# Altium PCB MSB-PCB-1R2.PcbDoc
Units mm, origin at the board's own origin, x right, y up, seen from the top; angles counter-clockwise.
Board outline 51 x 51 mm, 2 copper layers (Top Layer, Bottom Layer), stack 1.57 mm thick; 48 components, 55 nets, 221 pads, 21 vias.
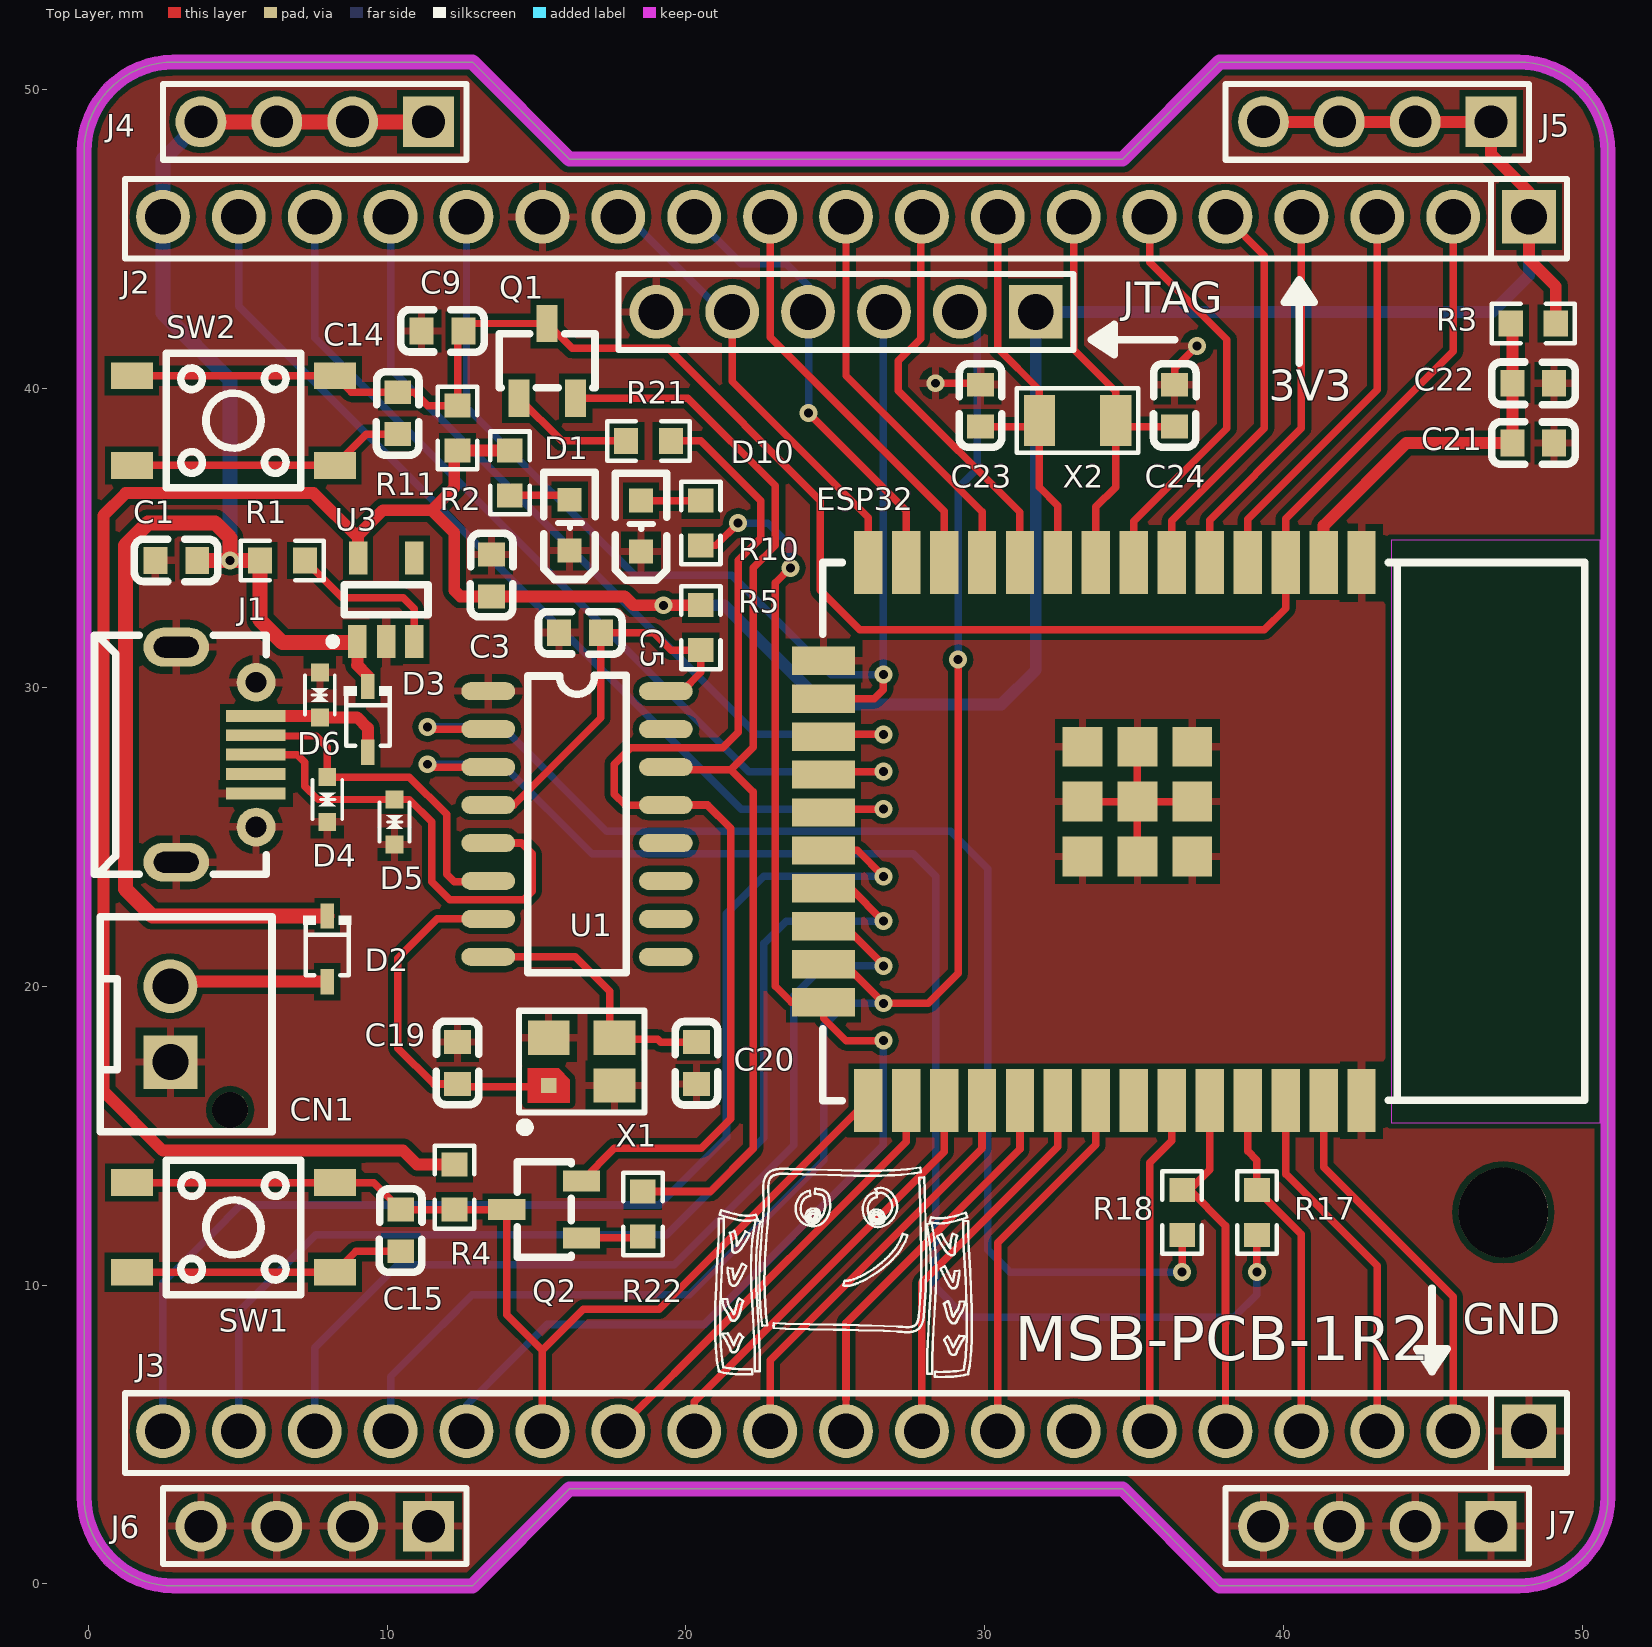
[diagram p0: Top Layer view]
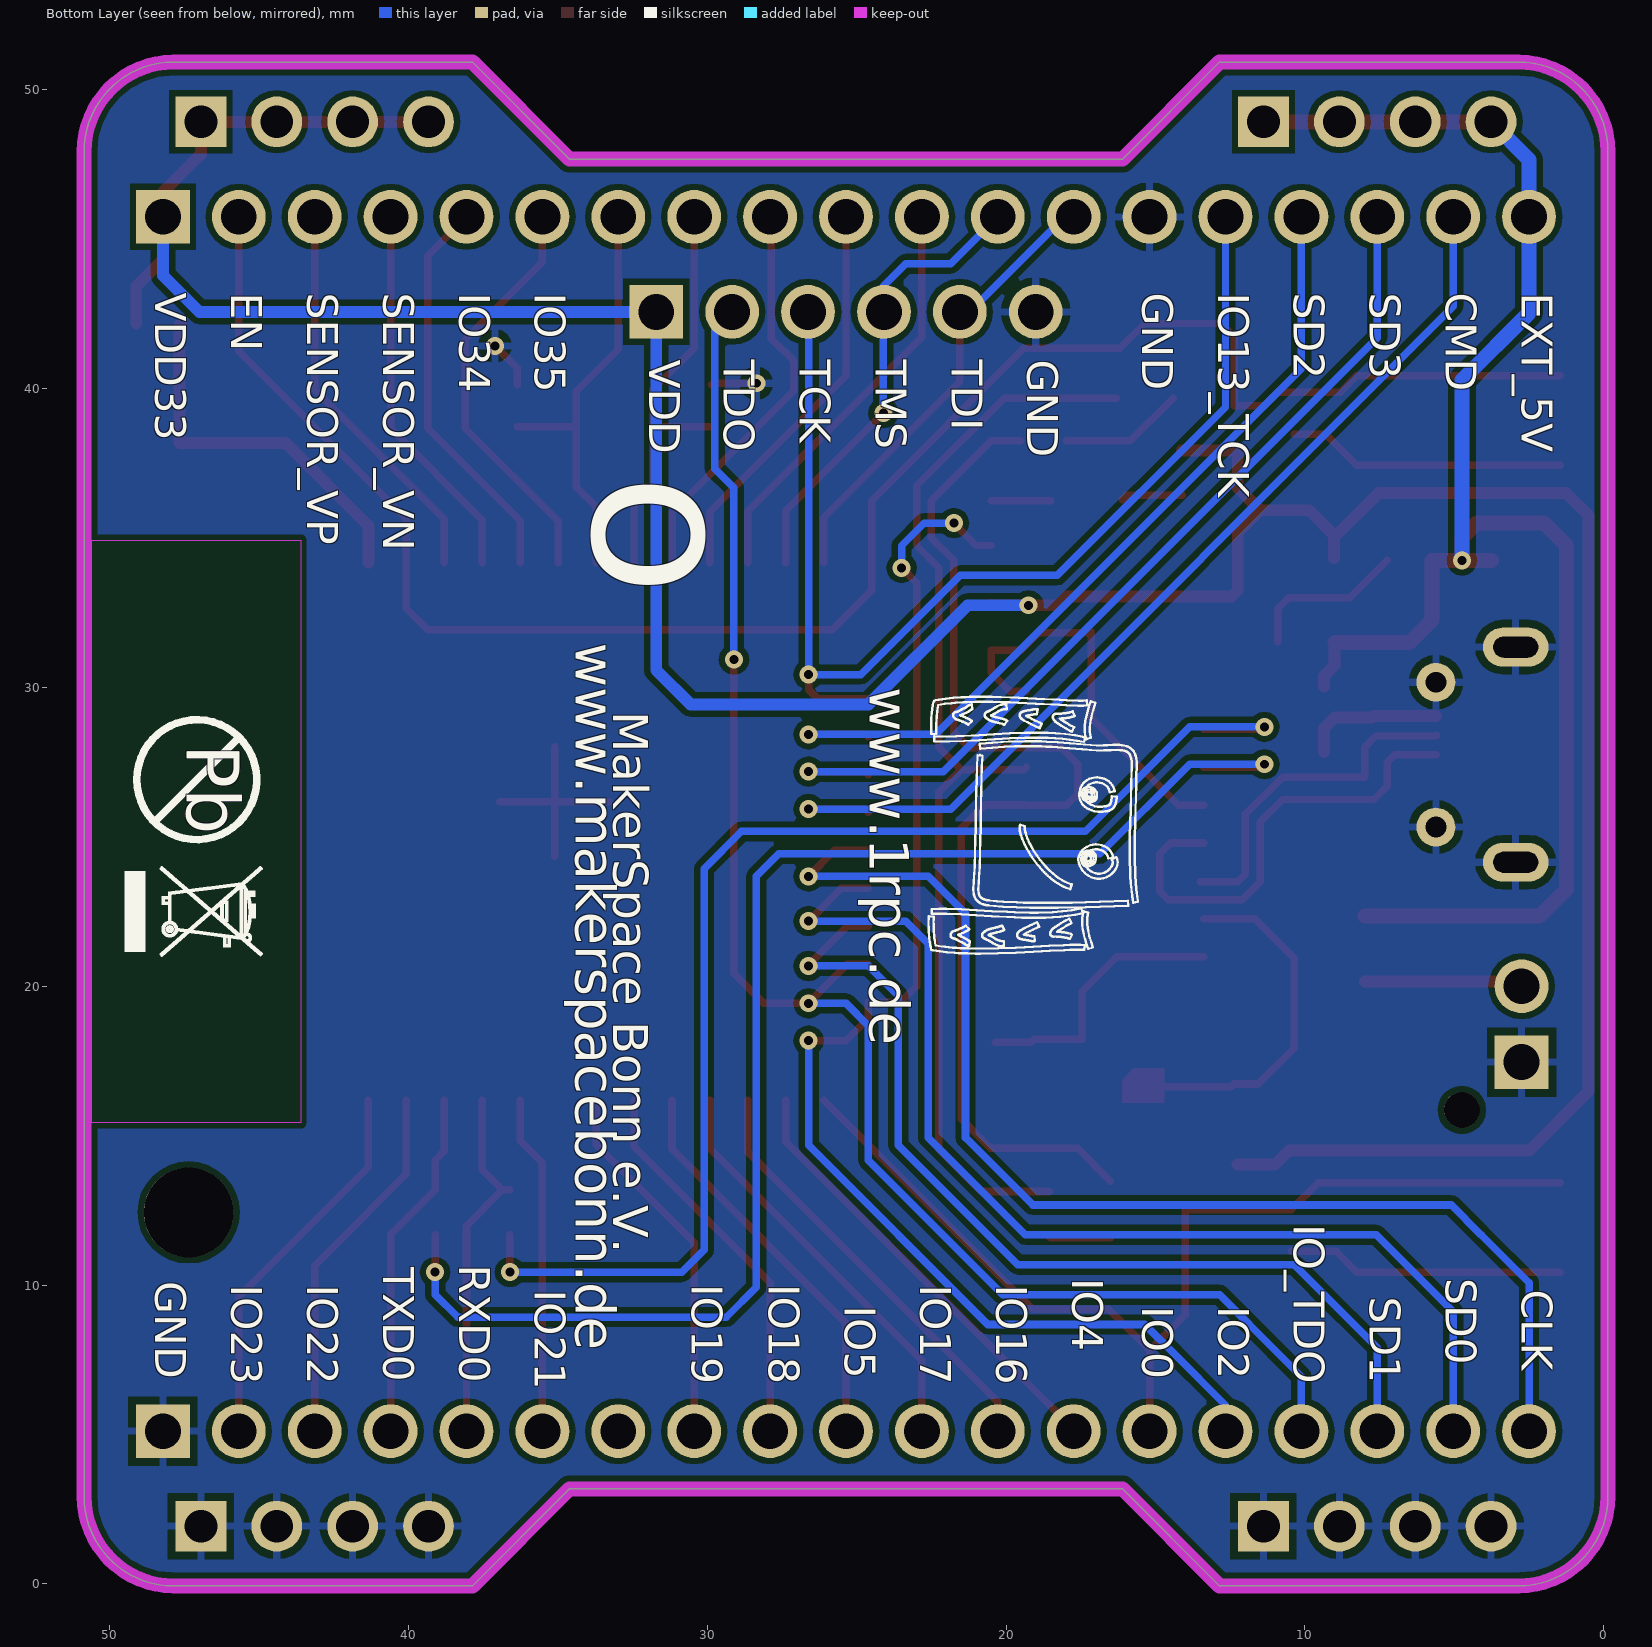
[diagram p1: Bottom Layer view, seen from below]

## Layer stack, top to bottom
Top Solder: solder mask 0.01, Solder Resist, Dk 3.5
Top Layer: signal copper 0.035
Dielectric 1: dielectric 1.5, FR-4, Dk 4.8
Bottom Layer: signal copper 0.035
Bottom Solder: solder mask 0.01, Solder Resist, Dk 3.5

## Board outline
-0.14,2.93 ccw(c2.86,2.93) 2.86,-0.07 12.86,-0.07 16.11,3.18 34.61,3.18 37.86,-0.07 47.86,-0.07 ccw(c47.86,2.93) 50.86,2.93 50.86,47.93 ccw(c47.86,47.93) 47.86,50.93 37.86,50.93 34.61,47.68 16.11,47.68 12.86,50.93 2.86,50.93 ccw(c2.86,47.93) -0.14,47.93

## Design rules (kind name [scope] priority, off if disabled: settings)
Clearance [All] p1: gap=0.2 ignorepadtopadclearanceinfootprint=FALSE
ComponentClearance [All] p1: gap=0.2 collisioncheckmode=3 verticalgap=0.2 showdistances=FALSE
HoleSize [All] p1: absolutevalues=TRUE maxlimit=3.5 minlimit=0.025 maxpercent=80.000 minpercent=20.000
MinimumSolderMaskSliver [All] p1: minsoldermaskwidth=0.05
PolygonConnect [All] p1: connectstyle=Relief reliefconductorwidth=0.254 reliefentries=4 polygonreliefangle="90 Angle" airgapwidth=0.254
RoomDefinition MSB-PCB-1R2 [InComponentClass('MSB-PCB-1R2')] p1: confinementstyle=ConfineIn formatcopy=TRUE lockcomponents=FALSE outline -0.14,-0.07 50.86,-0.07 50.86,50.93 -0.14,50.93
RoutingVias [All] p1: holewidth=0.3 width=0.6 viastyle="Through Hole" minholewidth=0.3 minwidth=0.6 maxholewidth=0.7 maxwidth=1
SilkToSilkClearance [All] p1 off: silktosilkclearance=0.1
SilkToSolderMaskClearance [IsPad] p1: minsilkscreentomaskgap=0.1 clearancetoexposedcopper=TRUE
SolderMaskExpansion [All] p1: expansion=0.102
Width [All] p1: maxlimit=0.6 minlimit=0.2 preferedwidth=0.25
25 further rules are at their usual default settings.

## Components (designator, comment, footprint, x,y, rotation, side; value= is the part's Value field where it differs from the comment)
C1 "22uF" C0603 2.95,34.25 r0 top
C3 "22uF" C0603 13.5,33.75 r270 top
C5 "100nF" C0603 16.46,31.83 r180 top
C9 "100nF" C0603 11.86,41.93 r0 top
C14 "100nF" C0603 10.36,39.18 r90 top
C15 "100nF" C0603 10.46,11.83 r90 top
C19 "20pF" C0603 12.36,17.43 r270 top
C20 "20pF" C0603 20.36,17.43 r90 top
C21 "22uF" C0603 48.36,38.18 r180 top
C22 "100nF" C0603 48.36,40.18 r180 top
C23 "12pF" C0603 29.86,39.43 r270 top
C24 "12pF" C0603 36.36,39.43 r270 top
CN1 "B2B-XH-AM (LF)(SN)" CONN-TH_B2B-XH-AM-LF-SN 2.75,18.73 r270 top
D1 "19-217/GHC-YR1S2/3T" LED0603-R-RD 16.11,35.43 r90 top
D2 "BAT760-7" SOD-323_L1.8-W1.3-LS2.5-RD 8,21.25 r270 top
D3 "BAT760-7" SOD-323_L1.8-W1.3-LS2.5-RD 9.36,28.93 r270 top
D4 "LESD5D5.0CT1G" SOD-523_L1.2-W0.8-LS1.6-BI 8,26.25 r90 top
D5 "LESD5D5.0CT1G" SOD-523_L1.2-W0.8-LS1.6-BI 10.25,25.5 r90 top
D6 "LESD5D5.0CT1G" SOD-523_L1.2-W0.8-LS1.6-BI 7.75,29.75 r270 top
D10 "19-217/BHC-ZL1M2RY/3T" LED0603-R-RD 18.5,35.399 r90 top
ESP32 "ESP32-WROOM-32E(4MB)" WIFI-SMD_ESP32-WROOM-32E 33.61,25.18 r180 top
J1 "MICROXNJ" MICRO-USB-SMD_MICROXNJ 4.283,27.75 r270 top
J2 "12251120CNG0S115005" HDR-TH_19P-P2.54-V 24.09,45.75 r180 top
J3 "12251120CNG0S115005" HDR-TH_19P-P2.54-V 24.09,5.11 r180 top
J4 "MTP125-1104S1" HDR-TH_4P-P2.54-V 7.58,48.93 r180 top
J5 "MTP125-1104S1" HDR-TH_4P-P2.54-V 43.14,48.93 r180 top
J6 "MTP125-1104S1" HDR-TH_4P-P2.54-V 7.58,1.93 r180 top
J7 "MTP125-1104S1" HDR-TH_4P-P2.54-V 43.14,1.93 r180 top
JTAG "MTP125-1106S1" HDR-TH_6P-P2.54-V 25.36,42.57 r180 top
Q1 "S8050_C2146" SOT-23-3_L3.0-W1.7-P0.95-LS2.9-BR 15.36,40.93 r270 top
Q2 "S8050_C2146" SOT-23-3_L3.0-W1.7-P0.95-LS2.9-BR 15.26,12.53 r0 top
R1 "1.8K" R0603 6.497,34.25 r0 top
R2 "560" R0603 14.11,37.18 r90 top
R3 "0" R0603 48.36,42.18 r180 top
R4 "10K" R0603 12.26,13.277 r90 top
R5 "0" R0603 20.5,32 r90 top
R10 "560" R0603 20.5,35.503 r270 top
R11 "10K" R0603 12.36,38.68 r270 top
R17 "270" R0603 39.11,12.43 r270 top
R18 "270" R0603 36.61,12.43 r270 top
R21 "10K" R0603 18.75,38.25 r180 top
R22 "10K" R0603 18.56,12.377 r270 top
SW1 "GT-TC074A-H038-L1" SW-SMD_4P-L4.5-W4.5-P3.00-LS7.0 4.86,11.93 r180 top
SW2 "GT-TC074A-H038-L1" SW-SMD_4P-L4.5-W4.5-P3.00-LS7.0 4.86,38.93 r180 top
U1 "CH340G" SOIC-16_L9.9-W3.9-P1.27-LS6.0-TL 16.36,25.43 r270 top
U3 "AP2112K-3.3TRG1" SOT-25-5_L3.0-W1.8-P0.95-LS3.0-BR 9.96,32.93 r270 top
X1 "12MHz" OSC-SMD_4P-L3.2-W2.5-BL 16.51,17.48 r0 top
X2 "32.768KHz" OSC-SMD_L3.2-W1.5 33.11,38.93 r0 top

## Footprints (in the part's own frame and the unit in brackets; to place one, negate y for a bottom-side part, rotate by r counter-clockwise, add the part's x,y. Pads: shape width x height; smd on the part's side, far side on the other; paste and mask are expansions set on the pad)
C0603 [mm]
  rect 0.8x0.9 smd: 1(-0.7,0) 2(0.7,0)
  silkscreen extent -1.41,-0.71 1.39,0.72
CONN-TH_B2B-XH-AM-LF-SN [mm]
  rect 1.8x1.8 hole 1.2: 1(1.27,0)
  round 1.8 hole 1.2: 2(-1.27,0)
  round 1.2 hole 1.2 unplated: ""(2.87,2)
  silkscreen extent -3.6,-2.35 3.6,3.4
HDR-TH_4P-P2.54-V [mm]
  rect 1.7x1.7 hole 1.1: 1(-3.81,0)
  round 1.7 hole 1.1: 2(-1.27,0) 3(1.27,0) 4(3.81,0)
  silkscreen extent -5.08,-1.27 5.08,1.27
HDR-TH_6P-P2.54-V [mm]
  rect 1.8x1.8 hole 1.2: 1(-6.35,0)
  round 1.8 hole 1.2: 2(-3.81,0) 3(-1.27,0) 4(1.27,0) 5(3.81,0) 6(6.35,0)
  silkscreen extent -7.62,-1.27 7.62,1.27
HDR-TH_19P-P2.54-V [mm]
  rect 1.8x1.8 hole 1.2: 1(-24.13,0)
  round 1.8 hole 1.2: 2(-21.59,0) 3(-19.05,0) 4(-16.51,0) 5(-13.97,0) 6(-11.43,0) 7(-8.89,0) 8(-6.35,0) 9(-3.81,0) 10(-1.27,0) 11(1.27,0) 12(3.81,0) 13(6.35,0) 14(8.89,0) 15(11.43,0) 16(13.97,0) 17(16.51,0) 18(19.05,0) 19(21.59,0)
  silkscreen extent -25.4,-1.27 22.86,1.4
LED0603-R-RD [mm]
  rect 0.8x0.8 smd: 1(0.851,0) 2(-0.851,0)
  silkscreen extent -1.82,-0.86 1.77,0.86
MICRO-USB-SMD_MICROXNJ [mm]
  rect 0.4x2 smd mask+0: 1(-1.3,1.327) 2(-0.65,1.327) 3(0,1.327) 4(0.65,1.327) 5(1.3,1.327)
  round 1.3 hole 0.7: 6(2.425,1.335) 9(-2.425,1.335)
  oval 1.3x2.2 hole 0.7 slot 1.5 at 90 deg: 7(3.6,-1.335) 8(-3.6,-1.335)
  silkscreen extent -4,-4.07 4,1.68
OSC-SMD_4P-L3.2-W2.5-BL [mm]
  rect 0.508x0.508 smd: 1(-1.1,-0.8)
  rect 1.4x1.15 smd: 2(1.1,-0.8) 3(1.1,0.8) 4(-1.1,0.8)
  Top Layer region: -1.8,-0.225 -0.762,-0.225 -0.4,-0.604 -0.4,-1.375 -1.8,-1.375
  silkscreen extent -2.1,-2.35 2.1,1.7
OSC-SMD_L3.2-W1.5 [mm]
  rect 1.05x1.7 smd: 1(-1.275,0) 2(1.275,0)
  silkscreen extent -2.03,-1.08 2.03,1.08
R0603 [mm]
  rect 0.806x0.864 smd: 1(-0.753,0) 2(0.753,0)
  silkscreen extent -1.39,-0.66 1.39,0.66
SOD-323_L1.8-W1.3-LS2.5-RD [mm]
  rect 0.845x0.455 smd: 1(-1.098,0) 2(1.098,0)
  silkscreen extent -1.1,-0.8 0.88,0.8
SOD-523_L1.2-W0.8-LS1.6-BI [mm]
  rect 0.6x0.6 smd: 1(-0.75,0) 2(0.75,0)
  silkscreen extent -0.65,-0.5 0.65,0.5
SOIC-16_L9.9-W3.9-P1.27-LS6.0-TL [mm]
  oval 0.6x1.8 smd: 1(-4.445,-2.972) 2(-3.175,-2.972) 3(-1.905,-2.972) 4(-0.635,-2.972) 5(0.635,-2.972) 6(1.905,-2.972) 7(3.175,-2.972) 8(4.445,-2.972) 9(4.445,2.972) 10(3.175,2.972) 11(1.905,2.972) 12(0.635,2.972) 13(-0.635,2.972) 14(-1.905,2.972) 15(-3.175,2.972) 16(-4.445,2.972)
  silkscreen extent -4.98,-1.65 4.98,1.65
SOT-23-3_L3.0-W1.7-P0.95-LS2.9-BR [mm]
  rect 1.25x0.7 smd: 1(1.25,-0.95) 2(1.25,0.95) 3(-1.25,0)
  silkscreen extent -0.9,-1.6 0.9,1.6
SOT-25-5_L3.0-W1.8-P0.95-LS3.0-BR [mil]
  rect 43.5x24.5 smd: 1(55,-37.5) 2(55,0.5) 3(55,37.5) 4(-55,37.5) 5(-55,-36.5)
  silkscreen extent -20,-75 60,56
SW-SMD_4P-L4.5-W4.5-P3.00-LS7.0 [mm]
  rect 1.4x0.9 smd: 1(-3.4,1.5) 2(3.4,1.5) 3(-3.4,-1.5) 4(3.4,-1.5)
  silkscreen extent -2.25,-2.25 2.25,2.25
WIFI-SMD_ESP32-WROOM-32E [mm]
  rect 0.95x2.1 smd: 1(-9.002,-9) 2(-7.732,-9) 3(-6.462,-9) 4(-5.192,-9) 5(-3.922,-9) 6(-2.652,-9) 7(-1.382,-9) 8(-0.112,-9) 9(1.158,-9) 10(2.428,-9) 11(3.698,-9) 12(4.968,-9) 13(6.238,-9) 14(7.508,-9) 25(7.507,9) 26(6.237,9) 27(4.967,9) 28(3.697,9) 29(2.427,9) 30(1.157,9) 31(-0.113,9) 32(-1.383,9) 33(-2.653,9) 34(-3.923,9) 35(-5.193,9) 36(-6.463,9) 37(-7.733,9) 38(-9.003,9)
  rect 2.1x0.95 smd: 15(9.002,-5.715) 16(9.002,-4.445) 17(9.002,-3.175) 18(9.002,-1.905) 19(9.002,-0.635) 20(9.002,0.635) 21(9.002,1.905) 22(9.002,3.175) 23(9.002,4.445) 24(9.002,5.715)
  rect 1.33x1.33 smd: 39(-3.337,-2.835) 39(-3.337,-1) 39(-3.337,0.835) 39(-1.502,0.835) 39(-1.502,-1) 39(-1.502,-2.835) 39(0.333,0.835) 39(0.333,-1) 39(0.333,-2.835)
  silkscreen extent -16.48,-9 9.02,9.02

## Part data
C1 C3 C21: BOM_JLCPCB Part Class="Extended Part", BOM_Manufacturer="Murata Electronics", BOM_Manufacturer Part=GRM188R61A226ME15L, BOM_Supplier=LCSC, BOM_Supplier Part=C167429, Contributor=LCSC, nameAlias=Capacitance, spicePre=C, spiceSymbolName=GRM188R61A226ME15L
C5 C9 C14 C15 C22: BOM_JLCPCB SMD=Yes, BOM_Manufacturer=YAGEO, BOM_Manufacturer Part=CC0603KRX7R9BB104, BOM_LCSC Assembly=Yes, BOM_Supplier=LCSC, BOM_Supplier Part=C14663, nameAlias=Capacitance, SMT Type=Basic, spicePre=C, spiceSymbolName=CC0603KRX7R9BB104
C19 C20: BOM_Manufacturer=CCTC, BOM_Manufacturer Part=TCC0603COG200J500CT, BOM_Supplier=LCSC, BOM_Supplier Part=C376774, Contributor=LCSC, nameAlias=Capacitance, spicePre=C, spiceSymbolName=TCC0603COG200J500CT
C23 C24: BOM_Manufacturer=CCTC, BOM_Manufacturer Part=TCC0603COG120J500CT, BOM_Supplier=LCSC, BOM_Supplier Part=C376767, Contributor=LCSC, nameAlias=Capacitance, spicePre=C, spiceSymbolName=TCC0603COG120J500CT
CN1: BOM_JLCPCB Part Class="Extended Part", BOM_Manufacturer="JST Sales America", BOM_Manufacturer Part=-, BOM_Supplier=LCSC, BOM_Supplier Part=C161869, Contributor=LCSC, spicePre=C, spiceSymbolName="B2B-XH-AM (LF)(SN)"
D1 D10: BOM_JLCPCB Part Class="Basic Part", BOM_Manufacturer=EVERLIGHT, BOM_Supplier=LCSC, spicePre=L
  D1: BOM_Manufacturer Part=19-217/GHC-YR1S2/3T, BOM_Supplier Part=C72043, spiceSymbolName=19-217/GHC-YR1S2/3T
  D10: BOM_Manufacturer Part=19-217/BHC-ZL1M2RY/3T, BOM_Supplier Part=C72041, spiceSymbolName=19-217/BHC-ZL1M2RY/3T
D2 D3: BOM_JLCPCB Part Class="Extended Part", BOM_Manufacturer=DIODES, BOM_Manufacturer Part=BAT760-7, BOM_Supplier=LCSC, BOM_Supplier Part=C124187, Contributor=LCSC, spicePre=D, spiceSymbolName=BAT760-7
D4 D5 D6: BOM_JLCPCB Part Class="Extended Part", BOM_Manufacturer="Leshan Radio", BOM_Manufacturer Part=LESD5D5.0CT1G, BOM_Supplier=LCSC, BOM_Supplier Part=C383211, Contributor=LCSC, spicePre=D, spiceSymbolName=LESD5D5.0CT1G
ESP32: BOM_LCSC Assembly=Yes, BOM_Manufacturer="Espressif Systems", BOM_Manufacturer Part=ESP32-WROOM-32E(4MB), BOM_Supplier=LCSC, BOM_Supplier Part=C701341, Contributor=LCSC, SMT Type=Extend, spicePre=U, spiceSymbolName=ESP32-WROOM-32E(4MB)
J1: BOM_Manufacturer="SHOU HAN", BOM_Manufacturer Part=MicroXNJ, BOM_Supplier=LCSC, BOM_Supplier Part=C404969, Contributor=LCSC, spicePre=U, spiceSymbolName=MICROXNJ
J2 J3: BOM_JLCPCB Part Class="Extended Part", BOM_Manufacturer=JILN, BOM_Manufacturer Part=12251120CNG0S115005, BOM_Supplier=LCSC, BOM_Supplier Part=C429964, Contributor=LCSC, spicePre=H, spiceSymbolName=12251120CNG0S115005
J4 J5 J6 J7 JTAG: BOM_JLCPCB Part Class="Extended Part", BOM_Manufacturer=MINTRON, BOM_Supplier=LCSC, Contributor=LCSC, spicePre=U
  J4 J5 J6 J7: BOM_Manufacturer Part=MTP125-1104S1, BOM_Supplier Part=C358686, spiceSymbolName=MTP125-1104S1
  JTAG: BOM_Manufacturer Part=MTP125-1106S1, BOM_Supplier Part=C358688, spiceSymbolName=MTP125-1106S1
Q1 Q2: BOM_JLCPCB SMD=Yes, BOM_Manufacturer=CJ, BOM_Manufacturer Part=S8050, BOM_LCSC Assembly=Yes, BOM_Supplier=LCSC, BOM_Supplier Part=C2146, image=//image.lceda.cn/szlcsc/C2146.jpg, SMT Type=Basic, spicePre=Q, spiceSymbolName=S8050_C2146
R1: BOM_JLCPCB Part Class="Extended Part", BOM_Manufacturer=UniOhm, BOM_Manufacturer Part=0603WAJ0182T5E, BOM_Supplier=LCSC, BOM_Supplier Part=C25991, nameAlias="Resistance (Ohms)", spicePre=R, spiceSymbolName=0603WAJ0182T5E
R2 R10: BOM_JLCPCB Part Class="Basic Part", BOM_Manufacturer=UniOhm, BOM_Manufacturer Part=0603WAF5600T5E, BOM_Supplier=LCSC, BOM_Supplier Part=C23204, nameAlias="Resistance (Ohms)", spicePre=R, spiceSymbolName=0603WAF5600T5E
R3 R5: BOM_JLCPCB SMD=Yes, BOM_Manufacturer=UniOhm, BOM_Manufacturer Part=0603WAF0000T5E, BOM_LCSC Assembly=Yes, BOM_Supplier=LCSC, BOM_Supplier Part=C21189, nameAlias="Resistance (Ohms)", SMT Type=Basic, spicePre=R, spiceSymbolName=0603WAF0000T5E
R4 R11 R21 R22: BOM_JLCPCB Part Class="Extended Part", BOM_Manufacturer=UniOhm, BOM_Manufacturer Part=0603WAJ0103T5E, BOM_Supplier=LCSC, BOM_Supplier Part=C15401, nameAlias="Resistance (Ohms)", spicePre=R, spiceSymbolName=0603WAJ0103T5E
R17 R18: BOM_JLCPCB Part Class="Extended Part", BOM_Manufacturer=UniOhm, BOM_Manufacturer Part=0603WAJ0271T5E, BOM_Supplier=LCSC, BOM_Supplier Part=C25223, nameAlias="Resistance (Ohms)", spicePre=R, spiceSymbolName=0603WAJ0271T5E
SW1 SW2: BOM_JLCPCB Part Class="Extended Part", BOM_Manufacturer=G-Switch, BOM_Manufacturer Part=GT-TC074A-H038-L1, BOM_Supplier=LCSC, BOM_Supplier Part=C843603, Contributor=LCSC, spicePre=S, spiceSymbolName=GT-TC074A-H038-L1
U1: BOM_JLCPCB SMD=Yes, BOM_Manufacturer=WCH, BOM_Manufacturer Part=CH340G, BOM_Supplier=LCSC, BOM_Supplier Part=C14267, image=//image.lceda.cn/szlcsc/C14267.jpg, SMT Type=Basic, spicePre=U, spiceSymbolName=CH340G, timeStamp=1468327462
U3: BOM_JLCPCB SMD=Yes, BOM_Manufacturer=DIODES, BOM_Manufacturer Part=AP2112K-3.3TRG1, BOM_Supplier=LCSC, BOM_Supplier Part=C51118, Contributor=LCSC, SMT Type=Extend, spicePre=U, spiceSymbolName=AP2112K-3.3TRG1
X1: BOM_JLCPCB SMD=Yes, BOM_Manufacturer=YXC, BOM_Manufacturer Part=X322512MSB4SI, BOM_LCSC Assembly=Yes, BOM_Supplier=LCSC, BOM_Supplier Part=C9002, nameAlias=Frequency, SMT Type=Basic, spicePre=X, spiceSymbolName=X322512MSB4SI
X2: BOM_JLCPCB Part Class="Extended Part", BOM_Manufacturer=TKD, BOM_Manufacturer Part=SF32K32768D31T-12.5, BOM_Supplier=LCSC, BOM_Supplier Part=C271654, Contributor=LCSC, nameAlias=Frequency, spicePre=X, spiceSymbolName=SF32K32768D31T-12.5

## Free pads (board coordinates)
  round 3 hole 3 unplated mask+1: 0(47.36,12.43)

## Via types
v1: diameter 0.6, hole 0.3, Top Layer to Bottom Layer, 21 vias

## Nets (pads, with @x,y where several pads share a name; then routed paths per layer and width w, separated by ;. In a path a pad name is that pad's centre, name@x,y a point inside that pad or via, vN(x,y) a via of type N, cw(c..) or ccw(c..) an arc to the next point about the centre after c; other vN are vias at no path point)
CLK: ESP32.20 J3.19 | length 41.5
  Top Layer w0.25: ESP32.20 25.745,24.545 v1(26.61,23.68)
  Bottom Layer w0.25: J3.19 2.5,10.07 4.11,11.68
  Bottom Layer w0.254: 4.11,11.68 5.11,12.68 19.11,12.68 21.36,14.93 21.36,22.43 22.61,23.68 v1(26.61,23.68)
CMD: ESP32.19 J2.18 | length 33.6
  Top Layer w0.25: ESP32.19 24.723,25.93 v1(26.61,25.93)
  Bottom Layer w0.25: J2.18 5.04,42.75 21.86,25.93 v1(26.61,25.93)
DTR: Q2.2 R21.1 U1.13 | length 37.4
  Top Layer w0.25: U1.13 17.975,26.065 17.61,26.43 17.61,27.43 18.16,27.98 21.23,27.98 21.75,28.5 21.75,34.25 22.5,35 22.5,36.25 20.5,38.25 R21.1
  Top Layer w0.254: Q2.2 17.61,14.58 20.51,14.58 21.5,15.57 21.5,25.29 20.725,26.065 U1.13
EN: C9.2 C14.2 ESP32.3 J2.2 Q1.3 R11.1 SW2.3 SW2.4 | length 63.2
  Top Layer w0.25: SW2.4 SW2.3 8.81,39.88 10.91,39.88 11.357,39.433 R11.1 12.36,41.73 C9.2 12.81,42.18 Q1.3 16.195,41.345 19.405,41.345 24.5,36.25 24.5,33.25 25.82,31.93 39.36,31.93 40.072,32.642 ESP32.3 40.072,35.642 45.68,41.25 J2.2
EXT_5V: C1.2 D2.1 D3.1 J2.19 J4.1 J4.2 J4.3 J4.4 R1.1 U3.1 | length 56.3
  Top Layer w0.4: 9,30.75 9.36,30.39 D3.1 ; 9.007,30.783 U3.1
  Top Layer w0.5: C1.2@3.75,34.25 v1(4.75,34.25) ; J4.4 J4.3 J4.2 J4.1 ; D2.1 2.152,22.348 1.25,23.25 1.25,34.75 2,35.5 4.25,35.5 4.75,35 v1(4.75,34.25) ; U3.1@9,31.5 6.5,31.5 5.744,32.256 R1.1 v1(4.75,34.25)
  Bottom Layer w0.5: J4.4 2.5,47.66 J2.19 2.5,42.53 4.75,40.28 v1(4.75,34.25)
GND: C1.1 C3.1 C5.2 C9.1 C19.1 C20.1 C21.1 C22.1 C23.1 C24.1 CN1.1 D1.2 D4.1 D5.1 D6.1 D10.2 ESP32.1 ESP32.15 ESP32.38 ESP32.39 J1.5 J1.6 J1.7 J1.8 J1.9 J2.14 J3.1 J6.1 J6.2 J6.3 J6.4 J7.1 J7.2 J7.3 J7.4 JTAG.6 U1.1 U3.2 X1.2 X1.4 | length 11.1
  Top Layer w0.25: J2.14 J2.14@15.2,46.39 ; v1(28.36,40.18) 29.81,40.18 C23.1 ; ESP32.39@33.277,26.18 ESP32.39@35.112,26.18 ; ESP32.39@35.112,24.345 ESP32.39@35.112,26.18 ; ESP32.39@35.112,28.015 ESP32.39@35.112,26.18 ; C24.1 36.36,40.68 v1(37.11,41.43) ; ESP32.39@36.947,26.18 ESP32.39@35.112,26.18
IO0: C15.2 ESP32.25 J3.14 Q2.3 R4.1 SW1.3 SW1.4 | length 35.2
  Top Layer w0.25: SW1.4 9.56,13.43 10.466,12.524 14.004,12.524 Q2.3 14.01,9.007 15.2,7.817 16.57,9.187 19.11,9.187 ESP32.25 ; J3.14 15.2,7.77
IO2: ESP32.24 J3.15 R10.2 | length 45.2
  Top Layer w0.25: R10.2 21,34.75 v1(21.75,35.5) ; v1(23.5,34) 23,33.5 23,20 23.535,19.465 ESP32.24 24.608,18.932 25.36,18.18 v1(26.61,18.18)
  Bottom Layer w0.25: J3.15 12.66,5.98 14.36,7.68 ; v1(21.75,35.5) 22.75,35.5 23.5,34.75 v1(23.5,34)
  Bottom Layer w0.254: 14.36,7.68 15.36,8.68 20.61,8.68 26.61,14.68 v1(26.61,18.18)
IO4: ESP32.26 J3.13 | length 15.1
  Top Layer w0.25: J3.13 17.74,5.17 19.61,7.04
  Top Layer w0.254: 19.61,7.04 27.373,14.803 ESP32.26
IO5: ESP32.29 J3.10 | length 13.5
  Top Layer w0.25: J3.10 25.36,6.18
  Top Layer w0.254: 25.36,6.18 25.36,8.73 31.183,14.553 ESP32.29
IO12_TDI: ESP32.14 J2.13 JTAG.5 | length 15.4
  Top Layer w0.25: JTAG.5 21.55,40.24 26.102,35.688 ESP32.14
  Bottom Layer w0.25: J2.13 18.04,45.75 21.22,42.57 JTAG.5
IO13_TCK: ESP32.16 J2.15 JTAG.3 | length 38.8
  Top Layer w0.25: ESP32.16 26.305,29.625 26.61,29.93 v1(26.61,30.43)
  Bottom Layer w0.25: J2.15 12.66,39.38 18.29,33.75 21.54,33.75 24.86,30.43 v1(26.61,30.43) 26.61,42.55 JTAG.3
IO14_TMS: ESP32.13 J2.12 JTAG.4 | length 15.5
  Top Layer w0.25: J2.12 J2.12@20.325,45.705 ; v1(24.11,39.18) 27.372,35.918 ESP32.13
  Bottom Layer w0.25: J2.12 21.85,44.18 23.36,44.18 24.09,43.45 JTAG.4 24.11,42.55 v1(24.11,39.18)
IO15_TDO: ESP32.23 J3.16 JTAG.2 | length 54.2
  Top Layer w0.25: ESP32.23 25.322,20.735 26.61,19.447 v1(26.61,19.43) 28.11,19.43 29.11,20.43 v1(29.11,30.93)
  Bottom Layer w0.25: J3.16 10.12,6.94 11.86,8.68 ; v1(29.11,30.93) 29.11,36.68 29.75,37.32 29.75,41.99 JTAG.2
  Bottom Layer w0.254: 11.86,8.68 12.86,9.68 20.11,9.68 24.61,14.18 24.61,18.68 25.36,19.43 v1(26.61,19.43)
IO16: ESP32.27 J3.12 | length 14.5
  Top Layer w0.25: J3.12 20.28,6.1 21.55,7.37
  Top Layer w0.254: 21.55,7.37 28.643,14.463 ESP32.27
IO17: ESP32.28 J3.11 | length 14
  Top Layer w0.25: J3.11 22.82,6.14
  Top Layer w0.254: 22.82,6.14 22.82,7.49 29.913,14.583 ESP32.28
IO18: ESP32.30 J3.9 | length 13
  Top Layer w0.25: J3.9 27.9,10.07
  Top Layer w0.254: 27.9,10.07 32.453,14.623 ESP32.30
IO19: ESP32.31 J3.8 | length 12.4
  Top Layer w0.25: J3.8 30.44,6.26
  Top Layer w0.254: 30.44,6.26 30.44,11.41 33.723,14.693 ESP32.31
IO21: ESP32.33 J3.6 | length 11.4
  Top Layer w0.25: J3.6 35.52,8.77
  Top Layer w0.254: 35.52,8.77 35.52,14.09 36.263,14.833 ESP32.33
IO22: ESP32.36 J3.3 | length 12.3
  Top Layer w0.25: 42.61,11.18 43.14,10.65 J3.3
  Top Layer w0.254: ESP32.36 40.073,13.717 42.61,11.18
IO23: ESP32.37 J3.2 | length 12.9
  Top Layer w0.25: 43.86,11.43 45.68,9.61 J3.2
  Top Layer w0.254: ESP32.37 41.343,13.947 43.86,11.43
IO25: ESP32.10 J2.9 | length 13.6
  Top Layer w0.25: J2.9 27.855,45.705 27.855,41.675 27.11,40.93 27.11,39.93 31.182,35.858 ESP32.10
IO26: ESP32.11 J2.10 | length 13.5
  Top Layer w0.25: J2.10 25.36,40.43 29.912,35.878 ESP32.11
IO27: ESP32.12 J2.11 | length 14
  Top Layer w0.25: J2.11 22.82,41.72 28.642,35.898 ESP32.12
IO32: C24.2 ESP32.8 J2.7 X2.2 | length 14.4
  Top Layer w0.25: J2.7 32.98,41.31 34.385,39.905 X2.2 X2.2@34.385,38.68 ; ESP32.8 33.722,36.042 34.385,36.705 X2.2@34.385,38.68 ; C24.2 34.435,38.73 X2.2@34.385,38.68
IO33: C23.2 ESP32.9 J2.8 X2.1 | length 14.5
  Top Layer w0.25: C23.2 31.635,38.73 X2.1 ; J2.8 30.44,41.35 31.835,39.955 X2.1 ; ESP32.9 32.452,36.088 31.835,36.705 X2.1
IO34: ESP32.6 J2.5 | length 13.4
  Top Layer w0.25: ESP32.6 36.262,35.582 39.36,38.68 39.36,44.45 J2.5
IO35: ESP32.7 J2.6 | length 13.9
  Top Layer w0.25: ESP32.7 34.992,35.562 38.11,38.68 38.11,41.64 35.52,44.23 J2.6
NetC14_1: C14.1 SW2.1 SW2.2 | length 9.3
  Top Layer w0.25: SW2.2 SW2.1 9.31,38.48 C14.1
NetC15_1: C15.1 SW1.1 SW1.2 | length 9.3
  Top Layer w0.25: SW1.2 SW1.1 8.96,11.13 C15.1
NetC19_2: C19.2 U1.7 X1.1 | length 12
  Top Layer w0.25: C19.2 12.46,16.63 X1.1@15.26,16.63
  Top Layer w0.254: C19.2 11.56,16.73 10.36,17.93 10.36,20.93 11.685,22.255 U1.7
NetC20_2: C20.2 U1.8 X1.3 | length 9.1
  Top Layer w0.254: U1.8 16.305,20.985 17.46,19.83 17.46,18.23 19.06,18.23 19.16,18.13 C20.2
NetCN1_2: CN1.2 D2.2 | length 5.3
  Top Layer w0.4: CN1.2 2.902,20.152 D2.2
NetD1_1: D1.1 R2.1 | length 2.1
  Top Layer w0.25: R2.1 15.964,36.427 D1.1
NetD10_1: D10.1 R10.1 | length 2
  Top Layer w0.25: D10.1 R10.1@20.494,36.25
NetQ1_1: Q1.1 R21.2 | length 4.2
  Top Layer w0.25: Q1.1 15.84,38.25 R21.2
NetQ2_1: Q2.1 R22.2 | length 2.1
  Top Layer w0.25: Q2.1 18.516,11.58 R22.2
NetR1_2: R1.2 U3.3 | length 5.4
  Top Layer w0.25: R1.2 8.5,33 10.54,33 10.912,32.628 U3.3
RTS: Q1.2 R22.1 U1.14 | length 37.5
  Top Layer w0.25: Q1.2 20.07,39.68 23,36.75 23,34.75 22.25,34 22.25,28 21.5,27.25
  Top Layer w0.254: R22.1 20.81,13.13 22.25,14.57 22.25,26.5 21.5,27.25 19.417,27.25 U1.14
RXD: R17.2 U1.3 | length 47.8
  Top Layer w0.25: v1(11.36,27.43) 11.455,27.335 U1.3 ; v1(39.11,10.43) R17.2
  Bottom Layer w0.25: v1(11.36,27.43) 13.86,27.43 16.86,24.43 27.61,24.43 28.36,23.68 28.36,9.93 29.36,8.93 38.36,8.93 39.11,9.68 v1(39.11,10.43)
RXD0: ESP32.34 J3.5 R18.1 | length 12.1
  Top Layer w0.25: J3.5 38.06,8.73
  Top Layer w0.254: R18.1 R18.1@36.857,13.183 ; ESP32.34 37.533,13.853 36.863,13.183 R18.1@36.857,13.183 ; 38.06,8.73 38.06,11.98 R18.1@36.857,13.183
SD0: ESP32.21 J3.18 | length 37.2
  Top Layer w0.25: ESP32.21 25.515,23.275 v1(26.61,22.18)
  Bottom Layer w0.25: J3.18 5.04,9.11 6.36,10.43
  Bottom Layer w0.254: 6.36,10.43 7.61,11.68 19.36,11.68 22.61,14.93 22.61,21.43 23.36,22.18 v1(26.61,22.18)
SD1: ESP32.22 J3.17 | length 32.6
  Top Layer w0.25: ESP32.22 25.322,22.005 26.61,20.717 v1(26.61,20.68)
  Bottom Layer w0.25: J3.17 7.58,7.9 9.605,9.925
  Bottom Layer w0.254: 9.605,9.925 10.36,10.68 19.61,10.68 23.61,14.68 23.61,19.68 24.61,20.68 v1(26.61,20.68)
SD2: ESP32.17 J2.16 | length 28.7
  Top Layer w0.25: ESP32.17 24.683,28.43 v1(26.61,28.43)
  Bottom Layer w0.25: J2.16 10.12,40.67 22.36,28.43 v1(26.61,28.43)
SD3: ESP32.18 J2.17 | length 31.1
  Top Layer w0.25: ESP32.18 24.703,27.18 v1(26.61,27.18)
  Bottom Layer w0.25: J2.17 7.58,41.71 22.11,27.18 v1(26.61,27.18)
SENSOR_VN: ESP32.5 J2.4 | length 12.8
  Top Layer w0.25: ESP32.5 37.532,35.602 40.6,38.67 J2.4
SENSOR_VP: ESP32.4 J2.3 | length 13.4
  Top Layer w0.25: ESP32.4 38.802,35.622 43.14,39.96 J2.3
TXD: R18.2 U1.2 | length 43.6
  Top Layer w0.25: v1(11.36,28.68) 11.435,28.605 U1.2 ; v1(36.61,10.43) R18.2
  Bottom Layer w0.25: v1(11.36,28.68) 13.86,28.68 17.36,25.18 28.86,25.18 30.11,23.93 30.11,11.18 30.86,10.43 v1(36.61,10.43)
TXD0: ESP32.35 J3.4 R17.1 | length 11.8
  Top Layer w0.25: 40.49,11.803 40.6,11.693 J3.4
  Top Layer w0.254: ESP32.35 38.803,14.487 39.11,14.18 R17.1 40.49,11.803
USB_DN: D4.2 J1.2 U1.6 | length 11.7
  Top Layer w0.25: J1.2 5.61,28.375 7.625,28.375 8,28 D4.2 10.75,27 12,25.75 12,23.75 12.25,23.5 U1.6@13.5,23.5
USB_DP: D5.2 J1.3 U1.5 | length 15.9
  Top Layer w0.25: J1.3 7,27.75 7.25,27.5 7.25,26.69 7.69,26.25 D5.2 10.75,26.25 11.5,25.5 11.5,23.5 12.102,22.898 12.5,22.898
  Top Layer w0.254: 12.5,22.898 14.578,22.898 14.86,23.18 14.86,24.43 14.495,24.795 U1.5
VBUS: D3.2 D6.2 J1.1 | length 4.7
  Top Layer w0.4: J1.1 D6.2@7.7,29.05 ; D6.2 8.75,29 9,29 9.36,28.64 D3.2
VDD33: C3.2 J2.1 J5.1 J5.2 J5.3 J5.4 JTAG.1 R2.2 R3.1 R4.2 R5.2 R11.2 U3.5 | length 121.2
  Top Layer w0.4: U3.5 9.033,35.007 ; R4.2 11.01,14.03 10.54,14.5 2.5,14.5 0.51,16.49 0.51,35.76 1.25,36.5 7.54,36.5 9.033,35.007 ; R2.2 14.104,37.927 12.25,37.927 12.25,36.68 11.5,35.93 ; R5.2 20.497,32.75 v1(19.25,32.75) 18.25,32.75 17.95,33.05 C3.2 12.45,33.05 12.25,33.25 12.25,35.18 11.5,35.93 ; J5.4 J5.3 J5.2 J5.1 46.95,47.84 48.22,46.57 J2.1 48.22,44.32 49.113,43.427 R3.1 ; 9.033,35.007 9.033,35.103 9.86,35.93 11.5,35.93
  Bottom Layer w0.4: v1(19.25,32.75) 21.29,32.75 24.61,29.43 30.56,29.43 31.71,30.58 JTAG.1 47,42.57 48.22,43.79 J2.1
VDD_ESP: C21.2 C22.2 ESP32.2 R3.2 | length 12.7
  Top Layer w0.4: ESP32.2 41.342,35.412 44.11,38.18 C21.2 47.66,42.127 R3.2
VDD_U1: C5.1 R5.1 U1.4 U1.16 | length 13.6
  Top Layer w0.25: U1.4 14.245,26.065 17.16,28.98 C5.1@17.16,31.84 ; C5.1 18.92,31.83 19.503,31.247 R5.1 20.5,30.5 19.875,29.875 U1.16
pads on no net: CN1. ESP32.32 J1.4 J3.7 U1.9 U1.10 U1.11 U1.12 U1.15 U3.4

## Polygon pours and split planes (outlines as drawn)
GND on Bottom Layer "Bottom Layer-GND" (solid, remove dead copper, pour order 0): -0.14,-0.07 -0.14,50.93 51.11,50.93 50.86,50.68 50.86,-0.07
GND on Top Layer "Top Layer-GND" (solid, remove dead copper, pour order 2): -0.14,-0.07 -0.14,50.93 51.11,50.93 50.86,50.68 50.86,-0.07

## Keep-outs
Keep-Out Layer:
  region: 43.61,34.93 43.61,15.43 50.61,15.43 50.61,34.93
  lines w0.5: -0.14,2.93 ccw(c2.86,2.93) 2.86,-0.07 12.86,-0.07 16.11,3.18 34.61,3.18 37.86,-0.07 47.86,-0.07 ccw(c47.86,2.93) 50.86,2.93 50.86,47.93 ccw(c47.86,47.93) 47.86,50.93 37.86,50.93 34.61,47.68 16.11,47.68 12.86,50.93 2.86,50.93 ccw(c2.86,47.93) -0.14,47.93 -0.14,2.93

## Other copper
Top Layer:
  text "1. Logo anklicken" at -43.54,-12.398 h2
  text "2. Rechte Maustaste Unions->Resize Union" at -43.539,-13.922 h2
  text "3. Logo erneut anklicken -> Union ist selektiert" at -43.54,-15.446 h2
  text "4. nun skalieren, wie gewohnt" at -43.54,-16.97 h2

## Silkscreen, mask and mechanical layers (free items; w line width, h text height)
Top Overlay:
  drawing of 1641 lines, arcs and shapes, not listed
  text "3V3" at 39.5,39.25 h1.78
  text "GND" at 46,8 h1.78
  text "MSB-PCB-1R2" at 31,7 h2.54
Bottom Overlay:
  drawing of 4921 lines, arcs and shapes, not listed
  text "EXT_5V" at 3.1,43.21 h1.78 r90
  text "CMD" at 5.64,43.21 h1.78 r90
  text "SD3" at 8.18,43.21 h1.78 r90
  text "SD2" at 10.72,43.21 h1.78 r90
  text "IO13_TCK" at 13.26,43.21 h1.78 r90
  text "GND" at 15.8,43.21 h1.78 r90
  text "IO35" at 36.12,43.21 h1.78 r90
  text "IO34" at 38.66,43.21 h1.78 r90
  text "SENSOR_VN" at 41.2,43.21 h1.78 r90
  text "SENSOR_VP" at 43.74,43.21 h1.78 r90
  text "EN" at 46.28,43.21 h1.78 r90
  text "VDD33" at 48.82,43.21 h1.78 r90
  text "GND" at 19.64,40.96 h1.78 r90
  text "TDI" at 22.18,40.96 h1.78 r90
  text "TMS" at 24.72,40.96 h1.78 r90
  text "TCK" at 27.26,40.96 h1.78 r90
  text "TDO" at 29.8,40.96 h1.78 r90
  text "VDD" at 32.3,40.96 h1.78 r90
  text "o" at 35.52,33.05 h9 r90
  text "www.makerspacebonn.de" at 34.84,31.5 h2.29 r90
  text "www.1rpc.de" at 25,30 h2.29 r90
  text "MakerSpace Bonn e.V." at 33.54,29.2 h2 r90
  text "Pb" at 48.001,28.107 h3.05 r90
  text "IO_TDO" at 10.72,12.027 h1.78 r90
  text "RXD0" at 38.66,10.681 h1.78 r90
  text "TXD0" at 41.2,10.604 h1.78 r90
  text "SD0" at 5.64,10.225 h1.78 r90
  text "IO4" at 18.14,10.225 h1.78 r90
  text "GND" at 48.82,10.13 h1.78 r90
  text "IO16" at 20.68,10.018 h1.78 r90
  text "IO17" at 23.22,10.018 h1.78 r90
  text "IO18" at 28.3,10.021 h1.78 r90
  text "IO19" at 30.87,10.021 h1.78 r90
  text "IO23" at 46.28,10.018 h1.78 r90
  text "IO22" at 43.74,10.011 h1.78 r90
  text "CLK" at 3.1,9.851 h1.78 r90
  text "IO21" at 36.12,9.838 h1.78 r90
  text "SD1" at 8.18,9.616 h1.78 r90
  text "IO5" at 25.76,9.308 h1.78 r90
  text "IO2" at 13.26,9.295 h1.78 r90
  text "IO0" at 15.8,9.298 h1.78 r90
Bottom Solder:
  text "2021 NEK" at 50.5,41.5 h1.78 r90
M1_Board Outline:
  the board outline again, w0.5
M2_Dimensions:
  lines w0.05: -0.14,-0.07 50.86,50.93 ; -0.14,25.43 50.86,25.43 ; -0.14,50.93 50.86,-0.07
M23_Template A4:
  lines w0.2: -11.413,-53.87 -11.413,-48.87 ; -11.413,129.13 -11.413,134.13 ; 59.587,-53.87 59.587,-48.87 ; 59.587,129.13 59.587,134.13 ; 103.76,-39.47 169.76,-39.47 ; 103.86,-30.46 202.576,-30.46 ; 129.037,-48.77 129.037,-39.57 ; 129.06,-46.352 202.576,-46.352 ; 129.06,-43.87 169.76,-43.87 ; 129.06,-41.37 169.76,-41.37 ; 130.587,-53.87 130.587,-48.87 ; 130.587,129.13 130.587,134.13 ; 169.837,-48.87 169.837,-30.47 ; 169.851,-42.041 202.413,-42.041 ; 169.86,-44.518 202.568,-44.518 ; 169.86,-32.274 202.522,-32.274 ; 169.951,-38.741 202.513,-38.741 ; 169.951,-36.941 202.513,-36.941 ; -77.413,-53.87 207.587,-53.87 207.587,134.13 -77.413,134.13 -77.413,-53.87 ; -72.413,-48.87 202.587,-48.87 202.587,129.13 -72.413,129.13 -72.413,-48.87
  lines w0.254: -77.413,-6.87 -72.413,-6.87 ; -77.413,40.13 -72.413,40.13 ; -77.413,87.13 -72.413,87.13 ; 103.787,-48.77 103.787,-30.47 ; 140.56,-48.77 140.587,-39.57 ; 155.76,-39.57 155.78,-46.27 ; 182.952,-44.57 182.965,-48.77 ; 189.852,-44.57 189.865,-48.77 ; 202.56,39.762 207.56,39.762 ; 202.587,-6.87 207.587,-6.87 ; 202.646,87.921 207.546,87.921
  text "1" at -43.663,130.88 h3
  text "2" at 24.337,130.88 h3
  text "3" at 94.837,130.88 h3
  text "4" at 171.587,130.88 h3
  text "A" at -75.413,109.88 h3
  text "A" at 204.587,108.91 h3
  text "B" at 204.546,64.621 h3
  text "B" at -75.413,63.38 h3
  text "C" at -75.413,16.13 h3
  text "C" at 204.546,15.921 h3
  text "File:" at 103.86,-29.27 h2.1
  text "'.DocumentName" at 107.96,-29.27 h2.1
  text "D" at -75.413,-31.12 h3
  text "PCB Nr." at 184.16,-31.77 h1.9
  text "D" at 204.587,-32.62 h3
  text "'.Prj_SchematicMainTitle'" at 119.752,-34.385 h4
  text "Assembly Nr." at 181.98,-38.394 h1.9
  text "Date" at 147.06,-40.77 h1.9
  text "Name" at 161.26,-40.77 h1.9
  text "Drawn by" at 130.36,-42.97 h2.1
  text "'.PRJ_Layouter'" at 156.11,-43.171 h2.1
  text "15.06.2021" at 144.582,-43.354 h2.1
  text "Variant:" at 171.158,-43.954 h2.1
  text "microUSB" at 176.61,-44.57 h2.1
  text "Approved" at 130.36,-45.47 h2.1
  text "'.Prj_ApproverDate'" at 141.377,-45.763 h2.1
  text "'.Prj_ApproverName'" at 155.451,-45.763 h2.1
  text "Status" at 174.456,-45.956 h1.9
  text "Format" at 184.256,-45.956 h1.9
  text "o" at 112.86,-46.57 h11
  text "'.Prj_CompanySiteName'" at 107.721,-47.996 h2.1
  text "'.Prj_AssemblyVariantStatus'" at 173.11,-48.07 h2.1
  text "Cluster" at 130.36,-48.17 h2.1
  text "'.Prj_CompanyClusterName'" at 145.959,-48.263 h2.1
  text "A4" at 185.466,-48.364 h2.1
  text "1" at -45.163,-52.12 h3
  text "2" at 22.837,-52.12 h3
  text "3" at 93.337,-52.12 h3
  text "4" at 170.087,-52.12 h3

## Dimensions
50.86,-0.07 to 50.86,50.93 on M2_Dimensions
-0.14,50.93 to 50.86,50.93 on M2_Dimensions